# EAGLE board teensy-jst_01.4 v10 (EAGLE 9.7.0)
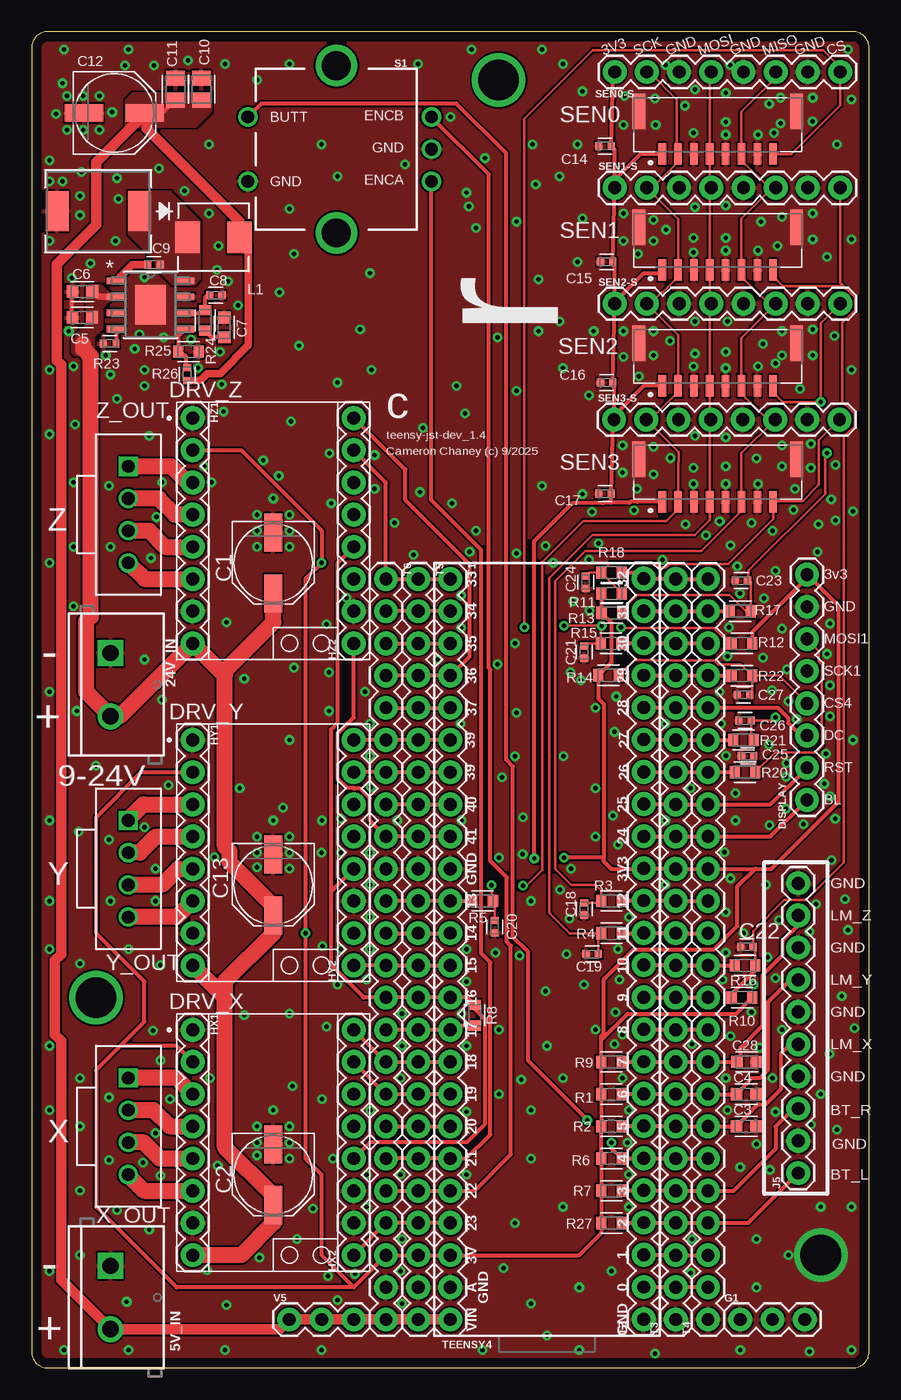
[diagram p0: board, top side]
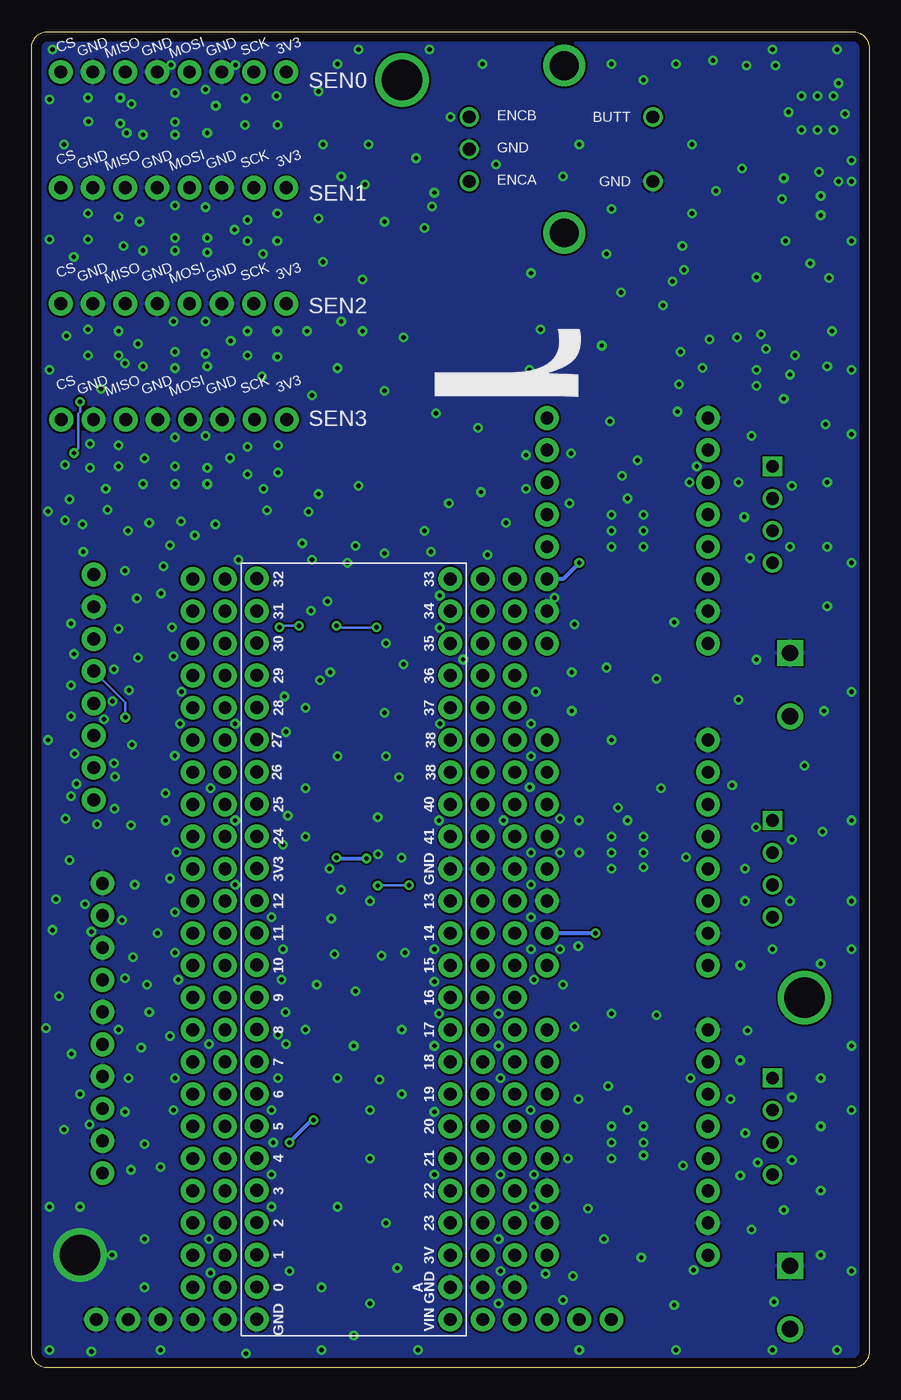
[diagram p1: board, bottom side, seen from below]

Size 66.04 x 105.41 mm. Coordinates in mm from the lower left corner, seen from the top.
Outline: 66.04,1.27 66.04,104.14 arc90 64.77,105.41 1.27,105.41 arc90 0,104.14 0,1.27 arc90 1.27,0 64.77,0 arc90 66.04,1.27
Copper layers (1*16): Top 0.035mm / dielectric 1.5mm / Bottom 0.035mm
Design rules "Fusion Electronics Design Rules *": minimum track width 6mil, minimum drill 0.35mm, track to track 6mil, track to pad 6mil, pad to pad 6mil, via to via 6mil, smd to smd 6mil, copper to edge 30mil, drill to drill 6mil, minimum pad ring 10mil, minimum via ring 8mil, stop-mask expansion 4mil, vias tented up to drill 14mil, thermal gap 6mil

## Footprints (pad centres in the part's own frame; a part is rotated, then mirrored left to right if it is on the bottom)
SCREWTERMINAL-5MM-2 = drill 1.3 pad 2.032 square: 1 0,0 | drill 1.3 pad 2.032: 2 5,0
PANASONIC_D = smd 3 x 1.4: + 2.4,0; - -2.4,0
CAPC1608X85 = smd 0.921 x 0.97: 1 -0.775,0; 2 0.775,0
CAPC1005X60 = smd 0.56 x 0.629: 1 -0.485,0; 2 0.485,0
CAPC2012X110 = smd 1.165 x 1.465: 1 -0.875,0; 2 0.875,0
SMC_DIO-L = smd 1.799 x 3.129: 1 -3.241,0; 2 3.241,0
1X08 = drill 1.016 pad 1.88: 1 0,0; 2 2.54,0; 3 5.08,0; 4 7.62,0; 5 10.16,0; 6 12.7,0; 7 15.24,0; 8 17.78,0
1X03 = drill 1.016 pad 1.88: 1 0,0; 2 2.54,0; 3 5.08,0
1X10 = drill 1.016 pad 1.88: 1 0,0; 2 2.54,0; 3 5.08,0; 4 7.62,0; 5 10.16,0; 6 12.7,0; 7 15.24,0; 8 17.78,0; 9 20.32,0; 10 22.86,0
MWSA0503S-100MT = smd 1.9 x 2.499: 1 2.05,0; 2 -2.05,0
RESC1608X60 = smd 0.799 x 0.974: 1 -0.815,0; 2 0.815,0
RESC1005X40 = smd 0.535 x 0.644: 1 -0.507,0; 2 0.507,0
ROTARY_ENC_PLAIN = drill 1.016: A 7.493,-2.54; B 7.493,2.54; C 7.493,0; SW+ -6.985,2.54; SW- -6.985,-2.54 | drill 2.286: P$3 0,6.604; P$4 0,-6.604
JST_BM08B-GHS-TBT(LF)(SN)(N) = smd 0.6 x 1.7: 1 4.375,0; 2 3.125,0; 3 1.875,0; 4 0.625,0; 5 -0.625,0; 6 -1.875,0; 7 -3.125,0; 8 -4.375,0 | smd 1 x 2.8: P1 -6.225,-3.35; P2 6.225,-3.35
1X24 = drill 1.016 pad 1.88: 1 -26.67,0; 2 -24.13,0; 3 -21.59,0; 4 -19.05,0; 5 -16.51,0; 6 -13.97,0; 7 -11.43,0; 8 -8.89,0; 9 -6.35,0; 10 -3.81,0; 11 -1.27,0; 12 1.27,0; 13 3.81,0; 14 6.35,0; 15 8.89,0; 16 11.43,0; 17 13.97,0; 18 16.51,0; 19 19.05,0; 20 21.59,0; 21 24.13,0; 22 26.67,0; 23 29.21,0; 24 31.75,0
DDA8_3P1X2P4_TEX = smd 1.46 x 0.533: 1 -2.724,1.905; 2 -2.724,0.635; 3 -2.724,-0.635; 4 -2.724,-1.905; 5 2.724,-1.905; 6 2.724,-0.635; 7 2.724,0.635; 8 2.724,1.905 | smd 2.4 x 3.1: EPAD 0,0
HX25418-4A = drill 1 square: 1 0,3.81 | drill 1: 2 0,1.27; 3 0,-1.27; 4 0,-3.81

## Placement (x,y rotation side)
5V_IN  [SCREWTERMINAL-5MM-2]  6.22,8.05 270 top
24V_IN  [SCREWTERMINAL-5MM-2]  6.22,56.39 270 top
C1  100uF/50V  [PANASONIC_D]  19.05,63.5 270 top
C2  100uF/50V  [PANASONIC_D]  19.05,15.24 270 top
C3  100nF  [CAPC1608X85]  56.36,19.05 0 top
C4  100nF  [CAPC1608X85]  56.36,21.59 0 top
C5  2.2uF  [CAPC1608X85]  3.99,82.87 180 top
C6  2.2uF  [CAPC1608X85]  4,84.91 180 top
C7  6.8nF  [CAPC1608X85]  15.19,82.07 90 top
C8  39pF  [CAPC1005X60]  14.53,84.61 0 top
C9  100nF  [CAPC1005X60]  9.64,87.03 0 top
C10  47uF  [CAPC2012X110]  13.38,100.87 90 top
C11  47uF  [CAPC2012X110]  11.35,100.87 90 top
C12  100uF/50V  [PANASONIC_D]  6.53,99 0 top
C13  100uF/50V  [PANASONIC_D]  19.05,38.1 270 top
C14  100nF  [CAPC1005X60]  45.21,96.39 180 top
C15  100nF  [CAPC1005X60]  45.34,87.25 180 top
C16  100nF  [CAPC1005X60]  45.34,77.72 180 top
C17  100nF  [CAPC1005X60]  45.21,68.96 180 top
C18  100pF  [CAPC1005X60]  43.56,36.2 90 top  (not fitted)
C19  100pF  [CAPC1005X60]  44.2,32.64 0 top  (not fitted)
C20  100pF  [CAPC1005X60]  36.51,34.8 90 top  (not fitted)
C21  100pF  [CAPC1005X60]  43.56,56.46 90 top  (not fitted)
C22  100pF  [CAPC1005X60]  56.4,33.22 0 top  (not fitted)
C23  100pF  [CAPC1005X60]  55.97,62.1 0 top  (not fitted)
C24  100pF  [CAPC1005X60]  43.69,61.98 90 top  (not fitted)
C25  100pF  [CAPC1005X60]  56.46,48.26 0 top  (not fitted)
C26  100pF  [CAPC1005X60]  56.26,51.05 0 top  (not fitted)
C27  100pF  [CAPC1005X60]  56.13,53.09 0 top  (not fitted)
C28  100nF  [CAPC1608X85]  56.39,24.13 0 top
CR1  B560C-13-FSMC_DIO-L  [SMC_DIO-L]  5.26,91.25 180 top
DISPLAY  [1X08]  61.15,62.58 270 top
DRV_X  TMC2209_BTT_BLANK  [MODULE_TMC2209_BTT_BLANK]  19.05,17.78 0 top
DRV_Y  TMC2209_BTT_BLANK  [MODULE_TMC2209_BTT_BLANK]  19.05,40.64 0 top
DRV_Z  TMC2209_BTT_BLANK  [MODULE_TMC2209_BTT_BLANK]  19.05,66.04 0 top
G1  455-1750-1-ND  [1X03]  55.88,3.81 0 top  (not fitted)
HX1  [1X08]  12.7,26.67 270 top
HX2  [1X08]  25.4,8.89 90 top
HY1  [1X08]  12.7,49.53 270 top
HY2  [1X08]  25.4,31.75 90 top
HZ1  [1X08]  12.7,74.93 270 top
HZ2  [1X08]  25.4,57.15 90 top
J5  [1X10]  60.45,15.37 90 top
L1  10uH  [MWSA0503S-100MT]  14.34,89.18 180 top
R1  10k  [RESC1608X60]  45.72,21.59 180 top
R2  10k  [RESC1608X60]  45.72,19.05 180 top
R3  0R  [RESC1608X60]  45.72,36.83 0 top
R4  100R  [RESC1608X60]  45.72,34.29 0 top
R5  100R  [RESC1608X60]  35.56,36.83 180 top
R6  10k  [RESC1608X60]  45.72,16.51 180 top
R7  10k  [RESC1608X60]  45.72,13.97 180 top
R8  1k  [RESC1608X60]  34.92,27.81 90 top
R9  10k  [RESC1608X60]  45.72,24.13 180 top
R10  10k  [RESC1608X60]  56.01,29.21 180 top
R11  10k  [RESC1608X60]  45.72,61.09 0 top
R12  10k  [RESC1608X60]  56.01,57.15 180 top
R13  10k  [RESC1608X60]  45.75,59.56 0 top
R14  10k  [RESC1608X60]  45.49,54.64 0 top
R15  100R  [RESC1608X60]  45.7,57.15 0 top
R16  100R  [RESC1608X60]  56.26,31.75 180 top
R17  100R  [RESC1608X60]  55.88,59.69 180 top
R18  100R  [RESC1608X60]  45.72,62.74 0 top
R20  100R  [RESC1608X60]  56.26,46.99 180 top
R21  100R  [RESC1608X60]  56.13,49.53 180 top
R22  100R  [RESC1608X60]  56.01,54.61 180 top
R23  100k  [RESC1005X40]  6.14,80.8 0 top
R24  13k  [RESC1608X60]  13.69,82.63 90 top
R25  51k  [RESC1608X60]  12.37,80.17 180 top
R26  270k  [RESC1005X40]  12.26,78.39 270 top
R27  10k  [RESC1608X60]  45.72,11.43 180 top
S1  ENCODER-SWITCH  [ROTARY_ENC_PLAIN]  24.03,96.14 0 top
SEN0  BM08B-GHS-TBT(LF)(SN)(N)  [JST_BM08B-GHS-TBT(LF)(SN)(N)]  54.1,95.76 180 top
SEN0-S  [1X08]  45.97,102.23 0 top  (not fitted)
SEN1  BM08B-GHS-TBT(LF)(SN)(N)  [JST_BM08B-GHS-TBT(LF)(SN)(N)]  54.1,86.61 180 top
SEN1-S  [1X08]  45.97,93.09 0 top  (not fitted)
SEN2  BM08B-GHS-TBT(LF)(SN)(N)  [JST_BM08B-GHS-TBT(LF)(SN)(N)]  54.1,77.47 180 top
SEN2-S  [1X08]  45.97,83.95 0 top  (not fitted)
SEN3  BM08B-GHS-TBT(LF)(SN)(N)  [JST_BM08B-GHS-TBT(LF)(SN)(N)]  54.1,68.33 180 top
SEN3-S  [1X08]  45.93,74.8 0 top  (not fitted)
T1  [1X24]  33.02,35.56 270 top
T2  [1X24]  48.28,30.51 90 top
T3  [1X24]  50.8,30.48 90 top  (not fitted)
T4  [1X24]  53.34,30.48 90 top  (not fitted)
T5  [1X24]  30.48,35.56 270 top  (not fitted)
T6  [1X24]  27.94,35.56 270 top  (not fitted)
TEENSY4  TEENSY_EXTENDED_BLANK  [TEENSY_EXTENDED_BLANK]  40.64,20.32 0 top
U1  TPS54360DDARDDA8_3P1X2P4_TEX  [DDA8_3P1X2P4_TEX]  9.38,83.85 0 top
V5  455-1750-1-ND  [1X03]  20.32,3.81 0 top  (not fitted)
X_OUT  HX25418-4A  [HX25418-4A]  7.62,19.05 0 top
Y_OUT  HX25418-4A  [HX25418-4A]  7.62,39.37 0 top
Z_OUT  HX25418-4A  [HX25418-4A]  7.62,67.31 0 top

## Library data of the parts
5V_IN 24V_IN = SparkFun-Connectors; SF_SKU: PRT-08432
C1 C2 C12 C13 = rcl; SPICEPREFIX: C
C3-C11 C14-C17 C28 = Capacitor; CATEGORY: Capacitor
C18-C27 = Capacitor
CR1 = 2024-09-23_20-34-24_Library; COPYRIGHT: Copyright (C) 2024 Ultra Librarian. All rights reserved.; MANUFACTURER_PART_NUMBER: B560C-13-F; MFR_NAME: Diodes Inc
DISPLAY HX1 HX2 HY1 HY2 HZ1 HZ2 SEN0-S SEN1-S SEN2-S SEN3-S = SparkFun-Connectors; PROD_ID: CONN-08438
DRV_X DRV_Y DRV_Z = TMC2209_BIGTREETECH
G1 V5 = SparkFun-Connectors; PROD_ID: XXX-00000
J5 = SparkFun-Connectors; PROD_ID: CONN-11563
L1 = rcl-buck
R1-R18 R20-R27 = Resistor; CATEGORY: Resistor; SUB-CATEGORY: Fixed
S1 = SparkFun-Switches-Encoder; SF_SKU: COM-09117
SEN0 SEN1-SEN3 = BM08B-GHS-TBT_LF__SN__N_; AVAILABILITY: In Stock; CHECK_PRICES: https://www.snapeda.com/parts/BM08B-GHS-TBT(LF)(SN)(N)/JST+Sales+America+Inc./view-part/?ref=eda; DESCRIPTION: Connector Header Surface Mount 8 position 0.049 (1.25mm); MF: JST Sales; MP: BM08B-GHS-TBT(LF)(SN)(N); PACKAGE: None; PRICE: None; SNAPEDA_LINK: https://www.snapeda.com/parts/BM08B-GHS-TBT(LF)(SN)(N)/JST+Sales+America+Inc./view-part/?ref=snap
T1-T6 = SparkFun-Connectors
TEENSY4 = TEENSY-4.1_CLEAN
U1 = 2024-09-23_20-06-51_Library; COPYRIGHT: Copyright (C) 2024 Ultra Librarian. All rights reserved.; MANUFACTURER_PART_NUMBER: TPS54360DDAR; MFR_NAME: Texas Instruments
X_OUT Y_OUT Z_OUT = HX25418-4A

## Nets
+3V3: C14.1 C15.1 C16.1 C17.1 DISPLAY.1 HX1.2 HY1.2 HY2.2 HZ1.2 HZ2.3 R1.2 R2.2 R6.2 R7.2 R9.2 R10.1 R11.1 R12.1 R13.1 R14.1 R27.2 SEN0-S.1 SEN0.1 SEN1-S.1 SEN1.1 SEN2-S.1 SEN2.1 SEN3-S.1 SEN3.1 T1.22 T2.15 T3.15 T4.15 T5.22 T6.22
+5V: 5V_IN.2 C10.1 C11.1 C12.+ L1.2 R26.2 T1.24 T5.24 T6.24 V5.1 V5.2 V5.3
+24V: 24V_IN.2 C1.+ C2.+ C5.1 C6.1 C13.+ HX1.8 HY1.8 HZ1.8 U1.2
BL: DISPLAY.8 T2.16 T3.16 T4.16
BUTT_ENC: R6.1 S1.SW+ T2.6 T3.6 T4.6
BUTT_HAND_L: J5.1 R27.1 T2.4 T3.4 T4.4
BUTT_HAND_R: J5.3 R7.1 T2.5 T3.5 T4.5
CS0: C21.2 R12.2 R15.1 SEN0-S.8 SEN0.8
CS0_M: R15.2 T2.22 T3.22 T4.22
CS1: C22.2 R10.2 R16.1 SEN1-S.8 SEN1.8
CS1_M: R16.2 T2.12 T3.12 T4.12
CS2: C23.2 R13.2 R17.1 SEN2-S.8 SEN2.8
CS2_M: R17.2 T2.23 T3.23 T4.23
CS3: C24.2 R11.2 R18.1 SEN3-S.8 SEN3.8
CS3_M: R18.2 T2.24 T3.24 T4.24
CS4: C27.2 DISPLAY.5 R14.2 R22.1
CS4_M: R22.2 T2.21 T3.21 T4.21
DC: DISPLAY.6 T2.20 T3.20 T4.20
DIR_X: HX2.8 T1.16 T5.16 T6.16
DIR_Y: HY2.8 T1.6 T5.6 T6.6
DIR_Z: HZ2.8 T1.4 T5.4 T6.4
EN_X: HX2.1 T1.21 T5.21 T6.21
EN_Y: HY2.1 T1.13 T5.13 T6.13
EN_Z: HZ2.1 T1.9 T5.9 T6.9
ENCA: S1.A T1.19 T5.19 T6.19
ENCB: S1.B T1.20 T5.20 T6.20
GND: 5V_IN.1 24V_IN.1 C1.- C2.- C3.2 C4.2 C5.2 C6.2 C7.2 C8.2 C10.2 C11.2 C12.- C13.- C14.2 C15.2 C16.2 C17.2 C18.1 C19.1 C20.1 C21.1 C22.1 C23.1 C24.1 C25.1 C26.1 C27.1 C28.2 CR1.2 DISPLAY.2 G1.1 G1.2 G1.3 HX1.1 HX1.7 HX2.2 HX2.3 HY1.1 HY1.7 HY2.3 HZ1.1 HZ1.7 HZ2.2 J5.2 J5.4 J5.6 J5.8 J5.10 R23.1 R25.1 S1.C S1.SW- SEN0-S.3 SEN0-S.5 SEN0-S.7 SEN0.3 SEN0.5 SEN0.7 SEN0.P1 SEN0.P2 SEN1-S.3 SEN1-S.5 SEN1-S.7 SEN1.3 SEN1.5 SEN1.7 SEN1.P1 SEN1.P2 SEN2-S.3 SEN2-S.5 SEN2-S.7 SEN2.3 SEN2.5 SEN2.7 SEN2.P1 SEN2.P2 SEN3-S.3 SEN3-S.5 SEN3-S.7 SEN3.3 SEN3.5 SEN3.7 SEN3.P1 SEN3.P2 T1.10 T1.23 T2.1 T3.1 T4.1 T5.10 T5.23 T6.10 T6.23 U1.7 U1.EPAD
LIM_X: C3.1 J5.5 R2.1 T2.7 T3.7 T4.7
LIM_Y: C4.1 J5.7 R1.1 T2.8 T3.8 T4.8
LIM_Z: C28.1 J5.9 R9.1 T2.9 T3.9 T4.9
MISO: C18.2 R3.1 SEN0-S.6 SEN0.6 SEN1-S.6 SEN1.6 SEN2-S.6 SEN2.6 SEN3-S.6 SEN3.6
MISO_M: R3.2 T2.14 T3.14 T4.14
MOSI: C19.2 R4.1 SEN0-S.4 SEN0.4 SEN1-S.4 SEN1.4 SEN2-S.4 SEN2.4 SEN3-S.4 SEN3.4
MOSI1: C25.2 DISPLAY.3 R20.1
MOSI1_M: R20.2 T2.18 T3.18 T4.18
MOSI_M: R4.2 T2.13 T3.13 T4.13
N$1: T2.2 T3.2 T4.2
N$3: T2.3 T3.3 T4.3
N$4: T2.10 T3.10 T4.10
N$6: T2.11 T3.11 T4.11
N$7: R23.2 U1.4
N$8: T1.12 T5.12 T6.12
N$10: C7.1 R24.1
N$11: T1.3 T5.3 T6.3
N$12: HZ1.6 Z_OUT.4
N$13: T1.2 T5.2 T6.2
N$14: C8.1 R24.2 U1.6
N$15: HZ1.5 Z_OUT.3
N$16: T1.8 T5.8 T6.8
N$17: HX1.6 X_OUT.4
N$18: HX1.5 X_OUT.3
N$19: R25.2 R26.1 U1.5
N$20: HZ1.4 Z_OUT.2
N$21: HZ1.3 Z_OUT.1
N$22: T1.18 T5.18 T6.18
N$23: HY1.4 Y_OUT.2
N$24: HX1.4 X_OUT.2
N$25: HX1.3 X_OUT.1
N$27: T1.5 T5.5 T6.5
N$28: R8.1 T1.15 T5.15 T6.15
N$29: HY1.3 Y_OUT.1
N$30: C9.2 CR1.1 L1.1 U1.8
N$32: C9.1 U1.1
N$36: HY1.6 Y_OUT.4
N$38: HY1.5 Y_OUT.3
RST: DISPLAY.7 T2.17 T3.17 T4.17
RX_X: HX2.4 HY2.4 HZ2.4 R8.2 T1.14 T5.14 T6.14
SCK: C20.2 R5.1 SEN0-S.2 SEN0.2 SEN1-S.2 SEN1.2 SEN2-S.2 SEN2.2 SEN3-S.2 SEN3.2
SCK1: C26.2 DISPLAY.4 R21.1
SCK1_M: R21.2 T2.19 T3.19 T4.19
SCK_M: R5.2 T1.11 T5.11 T6.11
STP_X: HX2.7 T1.17 T5.17 T6.17
STP_Y: HY2.7 T1.7 T5.7 T6.7
STP_Z: HZ2.7 T1.1 T5.1 T6.1

## Tracks (layer width: path | path; a pad name or v marks a point on that pad's centre or on a via)
+3V3  (via drill 0.35)
  Top 0.305: R11.1 44.94,61.06 R13.1 45.72,58.78 45.72,55.65 44.68,54.61 | R10.1 55.55,27.94 46.99,27.94 44.91,25.86 | 44.91,25.86 44.91,26.16 45.13,26.39 45.13,30.66 47.5,33.02 53.83,33.02 55.66,34.85 55.66,37.96 57.07,39.37 | R14.1 44.68,54.61 | 44.68,54.61 44.68,52.81 45.13,52.35 45.13,40.26 | 45.13,40.26 45.13,39.96 45.72,39.37 48.26,39.37 T2.15 50.77,39.4 T3.15 T4.15 57.07,39.37 | R12.1 56.82,58.04 61.14,62.36 DISPLAY.1 63.63,60.09 63.63,44.66 58.34,39.37 57.07,39.37 | 45.93,83.9 SEN2-S.1 45.97,87.23 C15.1 45.99,93.08 SEN1-S.1 | SEN2.1 48.26,77.47 45.93,75.14 | 45.93,75.14 45.93,74.93 | SEN1.1 49.47,86.36 48.26,86.36 45.93,84.03 45.93,83.9 | SEN0.1 48.01,95.76 45.97,93.73 SEN1-S.1 | SEN1-S.1 45.97,96.12 C14.1 45.86,102.12 SEN0-S.1 | SEN3-S.1 45.93,74.93 | 45.93,75.14 45.93,77.66 C16.1 45.99,83.84 45.93,83.9 | 45.71,68.25 45.7,68.29 C17.1 45.86,74.86 45.93,74.93 | 45.13,40.26 v41.99,40.26 | 45.71,68.25 45.08,68.25 45.04,68.21 42.65,68.21 39.61,65.17 39.61,40.24 39.63,40.21 v39.63,40.19 | 45.71,68.25 47.13,68.25 47.21,68.33 47.78,68.33 47.79,68.33 SEN3.1 | 44.91,25.86 R9.2 R1.2 R2.2 R6.2 R7.2 R27.2 44.91,10.62 43.18,8.89 T1.22 T5.22 T6.22 25.4,6.35 | 25.4,6.35 11.43,6.35 5.08,12.7 5.08,23.5 6.98,25.4 | 6.98,25.4 11.43,25.4 HX1.2 | 6.98,25.4 8.89,27.3 8.89,30.48 5.08,34.29 5.08,43.43 8.64,46.99 HY1.2 | 25.4,6.35 22.86,8.89 22.86,15.24 21.59,16.51 v21.59,34.29 21.59,62.23 v22.86,63.5 22.86,66.04 16.51,72.39 HZ1.2
  Bottom 0.305: v41.99,40.26 41.91,40.26 41.84,40.19 v39.63,40.19 | v22.86,63.5 24.13,62.23 HZ2.3 | v21.59,34.29 HY2.2
+5V
  Top 0.305: 11.35,100.24 C11.1 10.31,99 9.06,99
  Top 0.61: L1.2 17.09,88.47 17.09,80.66 14.86,78.43 13.84,78.43 13.33,77.92 13.24,77.92 13.2,77.88 R26.2
  Top 0.813: L1.2 16.39,90.45 9.06,97.77 9.06,99 C12.+ 8.95,99 5.08,95.12 5.08,90.17 1.98,87.07 1.98,79.47 2.33,79.13 2.33,32.63 1.84,32.14 1.84,26.28 2.33,25.79 2.33,6.94 5V_IN.2 19.56,3.05 V5.1 V5.2 V5.3 T6.24 T5.24 T1.24
  pour Top (isolate 0.254, no thermals): 7.36,97.9 12.97,97.9 14.2,99.12 14.2,100.54 7.95,100.54 7.36,99.95
+24V
  Top 0.305: 4.87,82.83 C5.1
  Top 0.508: C6.1 5.28,84.49 U1.2
  Top 1.27: 4.06,80.77 4.06,80.39 4.67,79.78 4.67,59.26 4.29,58.88 4.29,53.32 24V_IN.2 6.94,51.39 HZ1.8 15.24,54.61 | C1.+ 19.05,58.8 15.24,54.99 15.24,54.61 | 15.24,29.21 15.24,17.4 19.05,13.59 C2.+ 19.05,11.43 16.51,8.89 HX1.8 | 15.24,54.61 15.24,41.12 15.59,40.77 15.59,39.91 19.05,36.45 C13.+ 19.05,34.29 15.24,30.48 15.24,29.21 | 15.24,29.21 HY1.8
  pour Top (isolate 0.254, no thermals): 4.62,82.17 4.56,82.08 3.5,81.02 3.5,80.2 4.6,80.2 4.6,81.37 4.62,81.47 4.68,81.56 5.23,82.12 5.23,83.65 5.26,83.76 5.31,83.85 5.89,84.43 5.99,84.49 6,84.49 5.99,84.49 5.89,84.54 5.34,85.1 4.65,85.1 4.65,82.28
BL
  Top 0.305: DISPLAY.8 58.25,41.91 T4.16 T3.16 50.77,41.94 T2.16
BUTT_ENC  (via drill 0.35)
  Top 0.305: v45.72,17.78 45.72,17.32 R6.1 48.26,16.51 T2.6 50.77,16.54 T3.6 T4.6 | S1.SW+ 18.12,99.75 33.5,99.75 37.42,95.83 37.42,47.98 37.94,47.46 37.94,34.01 39.15,32.8 39.15,24.22 v43.81,19.56
  Bottom 0.305: v45.72,17.78 43.94,19.56 v43.81,19.56
BUTT_HAND_L
  Top 0.305: J5.1 56.52,11.43 T4.4 T3.4 50.77,11.46 T2.4 46.56,11.46 R27.1
BUTT_HAND_R
  Top 0.305: J5.3 60.09,20.45 58.67,19.03 58.67,17.28 55.36,13.97 T4.5 T3.5 50.77,13.99 T2.5 46.56,13.99 R7.1
CS0  (via drill 0.35)
  Top 0.203: v38.86,58.42 38.86,98.55 44.25,103.94 62.43,103.94 63.75,102.62 SEN0-S.8 63.75,99.6 59.91,95.76 SEN0.8 | R12.2 55.03,57.15 53.81,58.37 46.53,58.37 v46.48,58.42 | v41.99,58.55 v44.96,58.55 44.88,58.47 R15.1 43.65,57.15 C21.2
  Bottom 0.203: v38.86,58.42 41.86,58.42 v41.99,58.55 | v44.96,58.55 46.36,58.55 v46.48,58.42
CS0_M
  Top 0.305: T4.22 T3.22 48.31,57.15 T2.22 48.26,57.15 R15.2
CS1
  Top 0.203: 64.01,85.34 59.24,85.34 58.48,86.11 SEN1.8 | SEN1-S.8 63.75,85.6 64.01,85.34 | 64.01,85.34 64.21,85.14 64.25,85.14 64.95,84.44 64.95,83.45 64.25,82.75 64.21,82.75 63.93,82.47 63.93,76.23 64.16,76 64.2,76 64.9,75.3 64.9,74.31 64.2,73.61 64.16,73.61 64.04,73.48 64.04,39.86 61.09,36.91 59.35,36.91 56.89,34.45 C22.2 57.08,33.2 R16.1
  Top 0.305: R16.1 57.08,31.37 55.19,29.48 R10.2
CS1_M
  Top 0.305: T2.12 50.77,31.77 T3.12 T4.12 R16.2
CS2  (via drill 0.35)
  Top 0.203: SEN2-S.8 62.23,82.42 v62.23,76.2 59.24,76.2 58.48,76.96 SEN2.8 | R13.2 46.57,59.77 47.75,60.96 55.04,60.96 56.31,59.69 R17.1 56.69,61.98 C23.2 56.57,62.92 62.58,68.93 62.58,72.04 v62.71,72.17
  Bottom 0.203: v62.23,76.2 62.23,75.43 62.36,75.3 62.36,72.51 v62.71,72.17
CS2_M
  Top 0.305: T2.23 50.77,59.72 T3.23 T4.23 R17.2
CS3
  Top 0.203: SEN3-S.8 62.08,73.17 62.08,69.68 60.8,68.4 58.55,68.4 SEN3.8 58.48,66.95 54.95,63.42 50.31,63.42 50.01,63.12 49.48,63.12 49.13,63.48 45.65,63.48 R18.1 | R18.1 46.53,61.11 R11.2 | R18.1 43.96,62.74 C24.2
CS3_M
  Top 0.305: T4.24 T3.24 50.77,62.26 T2.24 47.8,62.74 R18.2
CS4
  Top 0.203: R22.1 58.96,54.61 DISPLAY.5 | C27.2 56.82,53.17 R22.1 | R22.1 55.93,55.5 54.14,55.5 53.83,55.8 49.18,55.8 49.16,55.83 47.5,55.83 R14.2
CS4_M
  Top 0.305: T2.21 50.77,54.63 T3.21 T4.21 R22.2
DC
  Top 0.305: DISPLAY.6 60.64,49.88 59.65,50.87 59.65,51.28 58.86,52.07 T4.20 T3.20 48.31,52.07 T2.20
DIR_X
  Top 0.305: HX2.8 T6.16 T5.16 T1.16
DIR_Y
  Top 0.305: T1.6 T5.6 T6.6 HY2.8
DIR_Z
  Top 0.305: T6.4 T5.4 T1.4 34.54,56.13 34.54,63.37 29.46,68.45 29.46,70.87 HZ2.8
EN_X
  Top 0.305: T1.21 T5.21 T6.21 HX2.1
EN_Y
  Top 0.305: T1.13 T5.13 T6.13 HY2.1
EN_Z
  Top 0.305: T1.9 T5.9 T6.9 26.67,43.18 26.67,44.94 25.92,45.7 25.42,45.7 25.38,45.74 24.88,45.74 24.15,46.47 24.15,50.05 25.4,51.29 HZ2.1
ENCA
  Top 0.305: S1.A 31.53,68.45 35.45,64.53 35.45,32.71 36.17,31.98 36.17,18.39 34.29,16.51 T1.19 T5.19 T6.19
ENCB
  Top 0.305: S1.B 36.05,94.16 36.05,55.22 36.18,55.09 36.18,39.98 37.47,38.69 37.47,33.62 37.78,33.3 37.78,16.83 34.92,13.97 T1.20 T5.20 T6.20
GND  (via drill 0.35, 3.2)
  Top 0.305: C5.2 3.13,84.89 C6.2 | 50.77,3.83 T3.1
  other vias: 8.89,55.88 41.91,22.86 39.37,16.51 39.37,5.08 13.13,78.9 55.88,15.83 58.55,97.41 54.74,98.3 54.74,89.15 52.2,89.15 58.8,88.52 58.67,79.25 54.74,80.14 52.32,80.01 54.74,71.12 52.2,70.99 60.2,69.34 63.5,96.52 55.12,26.16 8.89,77.47 34.16,75.31 20.32,102.87 40.26,69.6 15.11,75.44 64.14,36.96 64.65,12.7 64.9,26.8 29.42,94.95 33.49,77.47 13.97,96.52 8.89,78.74 34.29,92.71 26.67,86.36 41.91,102.87 19.05,20.32 23.24,58.67 20.32,27.94 62.23,8.89 62.91,24.77 62.72,87.63 4.64,87.14 34.47,91.62 39.96,85.85 39.96,81.79 41.63,93.98 41.63,82.55 20.91,10.16 62.23,21.59 63.5,18.8 62.23,12.7 59.69,8.89 57.15,6.35 57.15,10.16 41.91,12.7 38.1,11.43 39.37,20.32 36.86,26.67 34.29,33.02 34.29,30.48 43.56,30.23 42.16,32.64 39.37,36.83 40.64,25.4 44.45,26.67 46.03,28.07 45.72,7.62 43.18,6.35 40.64,2.54 35.56,1.39 22.86,1.39 55.88,1.39 43.18,1.39 64.65,1.39 15.24,1.39 7.62,1.39 2.54,1.39 3.81,8.89 3.81,13.97 3.81,19.05 3.81,22.86 1.39,20.32 1.39,25.4 1.39,7.62 1.39,73.66 1.39,63.5 1.39,53.34 1.39,43.18 1.39,36.83 1.39,33.02 1.39,78.74 1.39,95.25 2.54,104.02 7.62,104.02 15.24,102.87 17.78,101.6 24.13,93.98 22.86,96.52 20.32,91.44 30.48,102.87 38.61,22.73 45.97,50.16 45.85,43.56 46.1,52.96 44.45,52.07 44.45,45.72 44.45,41.91 38.1,48.26 56.77,66.67 55.12,64.9 60.07,67.69 58.67,62.87 57.66,56.01 54.76,48.28 54.36,50.8 55.5,45.34 55.5,43.18 46.23,41.27 61.98,64.39 63.88,29.34 64.65,78.74 64.64,89.03 64.65,100.08 64.39,104.02 40.26,104.02 34.67,104.02 47.88,78.23 41.91,78.87 44.32,81.79 43.05,87.25 43.43,90.68 50.04,89.79 57.66,80.77 57.53,90.42 47.75,69.34 57.15,71.75 60.58,77.22 57.75,60.71 30.1,64.14 24.13,30.23 23.24,26.92 20.57,22.23 19.81,44.2 10.16,31.75 7.62,33.02 3.68,42.29 3.81,31.88 5.08,47.5 9.27,10.92 6.73,12.45 10.92,21.21 9.78,36.83 9.78,39.37 10.29,69.85 9.27,73.53 6.73,93.85 6.6,88.9 14.6,86.61 13.97,91.06 10.03,94.61 8.13,80.39 10.41,81.28 14.86,80.14 15.49,85.72 14.73,88.52 6.86,92.2 3.94,94.36 3.81,90.93 7.37,102.74 6.35,99.06 2.41,101.35 12.06,92.84 20.7,87.88 16.26,83.82 25.91,81.92 24.13,77.72 21.08,80.64 20.45,74.68 33.15,68.2 26.8,78.74 56.13,34.29 64.39,34.54 54.74,35.94 46.74,100.33 58.17,99.69 49.02,70.48 49.02,72.64 59.18,72.77 59.18,71.12 61.59,81.92 61.59,79.88 59.18,79.88 59.18,81.79 49.02,81.79 49.02,79.88 49.02,88.9 49.02,90.55 61.59,91.06 61.59,89.03 59.18,90.81 61.59,100.2 59.05,100.2 59.05,98.17 49.21,98.04 49.16,100.15 2.41,93.6 1.39,93.6 1.39,88.9 3.81,92.46 8.51,81.53 8.89,86.05 12.57,81.15 57.28,88.14 54.74,88.14 52.2,88.01 52.2,97.41 54.74,97.28 57.28,97.28 57.28,78.99 54.74,78.87 52.2,78.99 57.28,69.72 54.74,69.72 52.2,69.72 46.61,72.77 47.8,87.88 46.66,98.04 46.61,70.63 46.67,88.9 46.67,91.06 46.67,79.76 46.67,81.79 43.05,96.52 43.43,100.71 43.94,76.71 38.23,51.69 38.23,64.26 38.23,77.09 38.23,90.42 36.86,40.26 33.83,50.8 35.74,95.43 46.23,33.02 42.49,54.86 44.01,59.71 36.59,32.77 38.47,32.51 38.75,43.43 36.73,55.5 36.73,81.28 54.23,53.34 58.13,49.15 42.7,60.46 43.31,54.23 59.54,47.69 62.04,66.55 58.2,42.82 59.5,44.12 59.48,46.64 62.5,46.06 59.18,58.29 9.84,67.12 9.4,63.88 8.9,42.66 10.16,15.17 8.78,16.19 9.77,18.51 63.07,40.05 20.32,49.53 22.86,40.64 38.1,57.15 30.84,74.17 43.43,68.93 33.91,43.18 37.08,46.61 34.29,15.24 34.29,20.19 34.29,25.4 22.91,21.21 36.86,21.59 10.16,24.26 10.79,45.97 10.29,52.7 52.32,73.53 54.74,73.41 52.32,82.55 54.86,82.55 52.32,91.57 54.74,91.69 52.32,100.84 54.74,100.58 47.12,15.24 47.12,12.7 46.99,17.78 47.12,20.32 46.35,30.61 47.12,35.56 26.29,53.34 23.62,68.2 26.67,35.56 26.67,33.02 26.67,38.1 26.67,40.64 26.67,48.26 26.67,50.8 16.41,45.72 14.07,22.86 13.83,7.72 17.97,8.7 20.32,19.05 20.32,17.78 20.32,16.51 17.78,17.78 17.78,19.05 20.32,39.37 20.32,40.64 20.32,41.91 17.78,41.91 17.78,40.64 19.05,43.18 20.32,64.77 20.32,66.04 20.32,67.31 17.78,67.31 17.78,66.04 17.78,64.77 19.05,68.58 14.67,15.94 17.78,16.76 17.78,39.5 5.33,100.33 4.06,100.33 2.79,100.33 2.79,97.66 4.06,97.66 5.33,97.66 1.9,98.93 61.58,98.32 55.06,102.77 49.98,102.77 39.49,96.52 51.52,99.57 63.3,81.41 63.41,71.25 63.41,66.85 62.95,58.72 62.95,53.85 62.95,51.41 60.34,51.15 62.95,45.09 63.06,68.51 61.44,70.99 61.44,72.9 58.44,66.02 38.72,40.51 40.51,64.86 47.5,67.65 44.2,67.52 41.94,48.26 50.39,71.77 62.72,56.31 62.65,48.46 58.37,53.45 50.34,81.03 55.85,61.09 59.67,52.6 59.56,55.12 55.64,63.23 41.13,63.52 44.7,65.06 53.18,65.69 54.26,66.77 51.56,66.55 43.94,63.75 54.48,30.61 58.93,35.31 42.42,35.43 41.66,37.72 42.55,39.37 28.83,43.18 23.75,16.51 20.7,55.24 15.37,58.8 16.76,54.36 16.76,27.81 37.21,7.87 39.75,93.34 35.05,89.92 19.56,84.84 29.21,5.08 29.08,7.62 29.21,10.16 29.08,15.24 29.08,22.86 29.21,25.4 29.21,27.94 26.42,30.61 54.99,58.42 51.94,45.72 52.07,25.53 57.15,17.65 61.34,1.27 49.15,1.14 30.61,69.09 35.05,66.04 3.56,51.82 2.92,81.79 3.17,85.98 6.73,76.45 6.22,78.36 3.3,60.07 3.3,78.99 3.3,69.85 3.3,64.77 3.43,74.42 5.84,79.88 23.37,7.24 6.1,41.66 6.22,36.83 6.1,21.34 6.1,16.38 6.1,69.6 6.22,64.77 51.94,7.49 52.07,10.16 54.86,56.13 33.02,98.68 15.37,4.95 24.13,5.33 7.49,5.21 26.42,12.7 54.63,40.66 60.88,42.88 58.22,15.62 57.91,38.1 58.67,30.73 58.04,32.38 58.42,22.86 58.67,20.19 54.86,20.32 54.74,22.86 45.97,25.53 46.61,22.86 46.61,26.29 56.77,28.07 59.18,26.67 61.47,19.18 9.65,102.74 12.32,103.12 40.51,29.72 54.74,32.77 55.12,38.61 63.37,43.31 64.77,67.56 64.77,49.53 61.85,36.58 61.34,34.42 49.74,63.76 49.99,50.8 49.99,43.18 49.99,38.1 26.72,20.32 14.17,69.85 14.43,40.29 28.62,66.67 33.86,58.39 33.86,60.93 26.76,45.81 23.45,51.82 23.45,54.86 24.81,60.76 22.94,33.27 25.5,7.42 9.57,26.61 22.18,12.57 19.48,70.38 18.26,71.6 14.99,77.59 26.42,15.24 34.54,64.39 27.05,72.01 27.05,69.34 23.49,72.14 24.38,33.02 22.89,43.18 24.38,43.31 24.38,40.64 13.59,71.12 33.91,27.94 32,55.88 56.93,30.23 57.4,25.27
  pour Top (rank 2): -6.29,-6.2 77.32,-6.2 77.32,110.34 -7.47,110.34 -7.47,-5.02
  pour Bottom: -8.83,-11.28 82.4,-11.28 82.4,109.16 81.22,110.34 -10.01,110.34 -10.01,-10.1
LIM_X
  Top 0.305: J5.5 59.82,25.53 59.1,24.81 59.1,22 57.89,20.79 57.25,20.79 C3.1 T4.7 T3.7 50.77,19.07 T2.7 46.56,19.07 R2.1
LIM_Y
  Top 0.305: J5.7 59.82,30.61 58.09,28.88 58.09,23.5 57.45,22.86 56.78,22.86 C4.1 T4.8 T3.8 50.77,21.61 T2.8 46.56,21.61 R1.1
LIM_Z
  Top 0.305: J5.9 60.45,34.91 59.21,33.66 59.21,32.54 57.62,30.95 57.62,26.96 55.87,25.21 55.87,24.38 C28.1 T4.9 T3.9 50.77,24.16 T2.9 46.56,24.16 R9.1
MISO
  Top 0.203: SEN1-S.6 58.42,93.09 | 58.42,93.09 58.17,93.09 55.98,95.28 SEN0.6 55.98,99.08 59,102.11 58.88,102.23 SEN0-S.6 | 58.42,93.09 55.98,90.65 SEN1.6 55.98,86.1 58.13,83.95 SEN2-S.6 55.98,81.25 SEN2.6 55.98,76.87 58.04,74.8 SEN3-S.6 55.98,72.15 SEN3.6 55.98,67.59 52.81,64.43 43.66,64.43 41.3,62.07 41.3,39.34 42.55,38.1 44.45,38.1 44.91,37.65 R3.1 44.75,36.68 C18.2
MISO_M
  Top 0.305: R3.2 46.56,36.85 T2.14 50.77,36.85 T3.14 T4.14
MOSI
  Top 0.203: 53.48,74.87 SEN3.4 53.48,66.88 52.29,65.69 44.2,65.69 40.82,62.32 40.82,35.89 42.42,34.29 R4.1 44.68,34.07 C19.2 | SEN3-S.4 53.48,74.87 | 53.48,74.87 SEN2.4 53.48,83.83 SEN2-S.4 53.48,84.06 SEN1.4 53.48,92.71 53.59,92.83 SEN1-S.4 53.48,93.21 SEN0.4 53.48,102.12 SEN0-S.4
MOSI1
  Top 0.203: DISPLAY.3 61.09,57.5 62.06,56.54 62.06,55.74 62.34,55.46 62.34,54.47 62.32,54.45 62.32,52.94 62.34,52.92 62.34,51.93 62.32,51.91 62.32,50.4 62.34,50.38 62.34,49.04 61.83,48.54 58.62,48.54 R20.1 57.08,48.17 C25.2
MOSI1_M
  Top 0.305: T2.18 50.77,47.02 T3.18 T4.18 R20.2
MOSI_M
  Top 0.305: R4.2 48.26,34.29 T2.13 50.77,34.31 T3.13 T4.13
N$1
  Top 0.305: T4.2 T3.2 48.31,6.35 T2.2
N$3
  Top 0.305: T2.3 50.77,8.91 T3.3 T4.3
N$4
  Top 0.305: T4.10 T3.10 48.31,26.67 T2.10
N$5  (via drill 3.2)
  other vias: 5.08,29.21
N$6
  Top 0.305: T2.11 50.77,29.23 T3.11 T4.11
N$7
  Top 0.305: R23.2 U1.4
N$8
  Top 0.305: T6.12 T5.12 T1.12
N$9  (via drill 3.2)
  other vias: 36.83,101.6
N$10
  Top 0.305: R24.1 13.69,81.79 14.18,81.3 C7.1
N$11
  Top 0.305: T6.3 T5.3 T1.3
N$12
  Top 1.27: Z_OUT.4 8.9,62.23 HZ1.6
N$13
  Top 0.305: T1.2 T5.2 T6.2
N$14
  Top 0.305: U1.6 13.61,83.22 R24.2 13.69,84.52 C8.1
N$15
  Top 1.27: Z_OUT.3 9.28,66.04 10.55,64.77 HZ1.5
N$16
  Top 0.305: T6.8 T5.8 T1.8
N$17
  Top 1.27: X_OUT.4 7.62,15.19 8.84,13.97 HX1.6
N$18
  Top 1.27: X_OUT.3 8.84,17.78 10.11,16.51 HX1.5
N$19
  Top 0.305: U1.5 11.55,81.4 R25.2 12.13,79.86 12.13,79.03 R26.1
N$20
  Top 1.27: Z_OUT.2 10.03,68.58 11.3,67.31 HZ1.4
N$21
  Top 1.27: Z_OUT.1 11.02,71.12 11.22,70.92 12.29,69.85 HZ1.3
N$22
  Top 0.305: T6.18 T5.18 T1.18
N$23
  Top 1.27: Y_OUT.2 8.53,40.64 9.8,41.91 HY1.4
N$24
  Top 1.27: X_OUT.2 9.6,20.32 10.87,19.05 HX1.4
N$25
  Top 1.27: X_OUT.1 11.43,22.86 HX1.3
N$27
  Top 0.305: T6.5 T5.5 T1.5
N$28
  Top 0.305: T6.15 T5.15 T1.15 33.35,27 R8.1
N$29
  Top 1.27: Y_OUT.1 7.62,43.27 8.8,44.45 HY1.3
N$30
  pour Top (isolate 0.254, no thermals): 9.77,87.33 9.78,87.3 9.78,86.81 11.13,85.45 12.84,85.45 13.31,85.92 13.31,90.43 10.94,92.79 7.62,92.79 7.62,89.47
N$32
  Top 0.61: C9.1 7.93,87.03 U1.1
N$36
  Top 1.27: Y_OUT.4 11.43,35.56 HY1.6
N$38
  Top 1.27: Y_OUT.3 10.29,38.1 11.56,39.37 HY1.5
RST
  Top 0.305: DISPLAY.7 58.25,44.45 T4.17 T3.17 50.77,44.48 T2.17
RX_X
  Top 0.305: HX2.4 26.7,17.8 34.31,17.8 35.72,19.21 35.72,27.52 34.92,28.32 R8.2 34.34,29.21 T1.14 T5.14 T6.14 26.18,29.21 23.62,31.77 23.62,37.54 23.62,37.59 | 23.62,37.59 HY2.4 | HZ2.4 24.13,63.5 24.13,50.92 23.62,50.36 23.62,37.59
SCK  (via drill 0.35)
  Top 0.203: v38.75,38.05 39.03,38.05 40.26,39.28 40.26,63.55 43.5,66.79 50.02,66.79 50.98,67.74 SEN3.2 50.98,71.45 51.03,71.5 51.03,72.24 SEN3-S.2 48.77,74.8 50.98,77.01 SEN2.2 50.98,81.48 SEN2-S.2 48.77,83.95 49.7,84.88 49.75,84.88 50.98,86.1 SEN1.2 50.98,90.63 SEN1-S.2 48.77,93.34 49.17,93.34 50.98,95.15 SEN0.2 50.89,95.84 50.89,100.03 48.69,102.23 SEN0-S.2 | C20.2 36.51,36.7 R5.1 36.28,36.93 v36.28,38.07
  Bottom 0.203: v36.28,38.07 38.73,38.07 v38.75,38.05
SCK1  (via drill 0.35)
  Top 0.203: R21.1 56.75,49.73 C26.2 58.41,51.05 v58.66,51.31
  Bottom 0.203: v58.66,51.31 58.66,52.48 DISPLAY.4
SCK1_M
  Top 0.305: T2.19 50.77,49.55 T3.19 T4.19 R21.2
SCK_M
  Top 0.305: T6.11 T5.11 T1.11 R5.2
STP_X
  Top 0.305: T1.17 T5.17 T6.17 HX2.7
STP_Y
  Top 0.305: HY2.7 T6.7 T5.7 T1.7
STP_Z
  Top 0.305: T1.1 T5.1 T6.1 27.94,69.85 HZ2.7

## Text on the board
tPlace: 3V3 | SCK | GND | MOSI | GND | MISO | GND | CS | BUTT | ENCB | GND | GND | ENCA | r | c | teensy-jst-dev_1.4 | Cameron Chaney (c) 9/2025 | Z | 3v3 | GND | MOSI1 | - | SCK1 | CS4 | + | DC | 9-24V | RST | BL | Y | GND | LM_Z | GND | LM_Y | GND | LM_X | GND | BT_R | X | GND | BT_L | - | +
bPlace: 3V3 | SCK | GND | MOSI | GND | MISO | GND | CS | SEN0 | BUTT | ENCB | GND | 3V3 | SCK | GND | MOSI | GND | MISO | GND | CS | GND | ENCA | SEN1 | 3V3 | SCK | GND | MOSI | GND | MISO | GND | CS | SEN2 | r | 3V3 | SCK | GND | MOSI | GND | MISO | GND | CS | SEN3